# Altium PCB Backplane.PcbDoc (part 3 of 3)
Units mil, origin at the board's own origin, x right, y up, seen from the top; angles counter-clockwise.
Board outline 10300 x 6600 mil, 2 copper layers (Top Layer, Bottom Layer), stack 61.756 mil thick; 53 components, 149 nets, 1204 pads, 195 vias.
Unrouted connection lines stored in the file: 4.
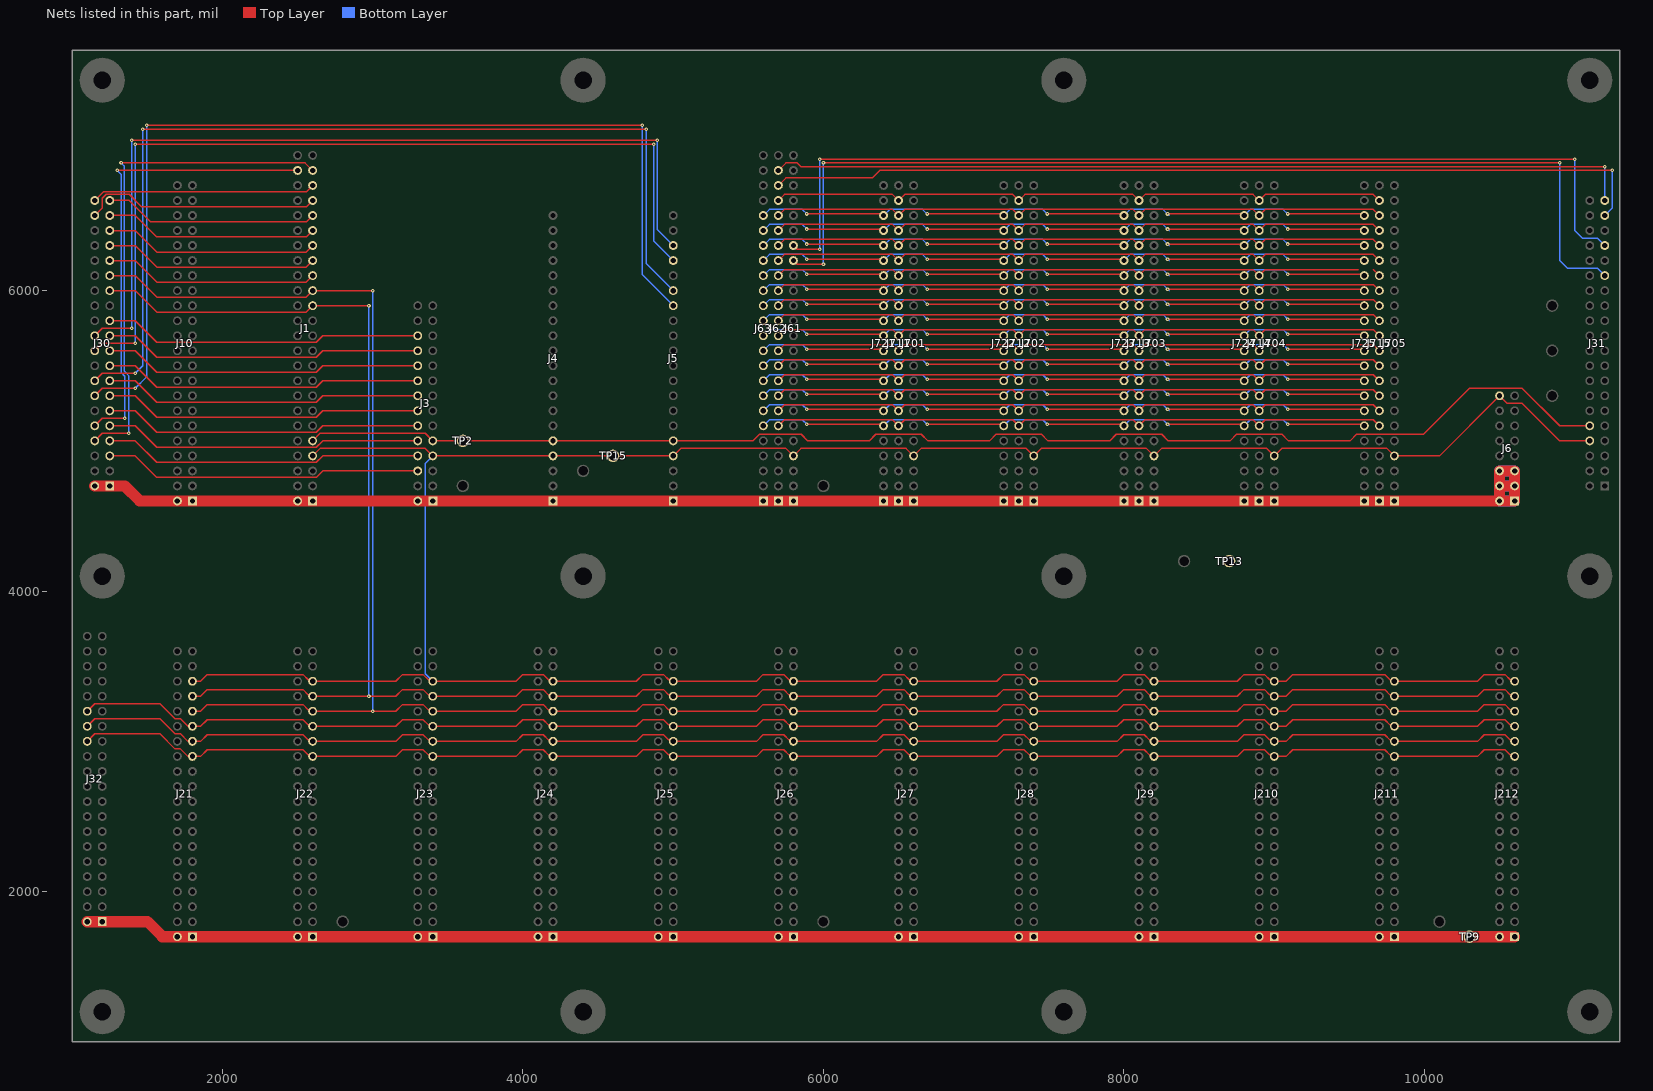
[diagram p3: the nets of this part, all layers, seen from the top]

## Via types
v1: diameter 24, hole 10, Top Layer to Bottom Layer, tented both sides, 195 vias

## Nets (pads, with @x,y where several pads share a name; then routed paths per layer and width w, separated by ;. In a path a pad name is that pad's centre, name@x,y a point inside that pad or via, vN(x,y) a via of type N, cw(c..) or ccw(c..) an arc to the next point about the centre after c; other vN are vias at no path point) (continued)
INST0: J3.20 J30.19 | length 2127
  Top Layer w10: J30.19@1250,5600 1420,5600 1563,5457 2624,5457 2667,5500 J3.20@3300,5500
INST1: J3.18 J30.17 | length 2127
  Top Layer w10: J30.17@1250,5500 1420,5500 1563,5357 2624,5357 2667,5400 J3.18@3300,5400
INST2: J3.16 J30.15 | length 2127
  Top Layer w10: J30.15@1250,5400 1420,5400 1563,5257 2624,5257 2667,5300 J3.16@3300,5300
INST3: J3.14 J30.13 | length 2127
  Top Layer w10: J30.13@1250,5300 1420,5300 1563,5157 2624,5157 2667,5200 J3.14@3300,5200
INST4: J3.12 J30.11 | length 2127
  Top Layer w10: J30.11@1250,5200 1420,5200 1563,5057 2624,5057 2667,5100 J3.12@3300,5100
INST5: J3.10 J30.9 | length 2127
  Top Layer w10: J30.9@1250,5100 1420,5100 1563,4957 2624,4957 2667,5000 J3.10@3300,5000
INST6: J3.8 J30.7 | length 2127
  Top Layer w10: J30.7@1250,5000 1420,5000 1563,4857 2624,4857 2667,4900 J3.8@3300,4900
INST7: J3.6 J30.5 | length 2127
  Top Layer w10: J30.5@1250,4900 1420,4900 1563,4757 2624,4757 2667,4800 J3.6@3300,4800
IS#: J1.46 J30.10 | length 3091.4
  Top Layer w10: J30.10@1150,5100 1200,5150 v1(1350,5150) ; v1(1300,6800) J1.46@2500,6800
  Bottom Layer w10: v1(1300,6800) 1325,6775 1325,5455 1350,5430 v1(1350,5150)
JI#: J5.14 J30.14 | length 6656.7
  Top Layer w10: J30.14@1150,5300 1200,5350 v1(1420,5350) ; v1(1495,7100) v1(4795,7100)
  Bottom Layer w10: v1(1420,5350) 1495,5425 v1(1495,7100) ; v1(4795,7100) 4795,6105 J5.14@5000,5900
JO#: J5.17 J30.20 | length 5894.6
  Top Layer w10: J30.20@1150,5600 1200,5650 v1(1420,5650) ; v1(1420,6975) v1(4870,6975)
  Bottom Layer w10: v1(1420,5650) v1(1420,6975) ; v1(4870,6975) 4870,6330 J5.17@5000,6200
KI#: J5.15 J30.16 | length 6436
  Top Layer w10: J30.16@1150,5400 1200,5450 v1(1420,5450) ; v1(1470,7075) v1(4820,7075)
  Bottom Layer w10: v1(1420,5450) 1470,5500 v1(1470,7075) ; v1(4820,7075) 4820,6180 J5.15@5000,6000
KO#: J5.18 J30.22 | length 5759.2
  Top Layer w10: J30.22@1150,5700 1200,5750 v1(1395,5750) ; v1(1395,7000) v1(4895,7000)
  Bottom Layer w10: v1(1395,5750) v1(1395,7000) ; v1(4895,7000) 4895,6405 J5.18@5000,6300
LM#: J1.9 J3.9 J4.5 J5.5 J31.10 TP2.1 | length 8970
  Top Layer w10: J1.9@2600,5000 2650,5050 3350,5050 J3.9@3400,5000 TP2.1@3600,5000 J4.5@4200,5000 J5.5@5000,5000 5530,5000 5573.47,5043.47 5851.53,5043.47 5895,5000 6305,5000 6348.47,5043.47 6651.53,5043.47 6695,5000 7105,5000 7148.47,5043.47 7451.53,5043.47 7495,5000 7905,5000 7948.47,5043.47 8251.53,5043.47 8295,5000 8705,5000 8748.47,5043.47 9051.53,5043.47 9095,5000 9505,5000 9548.47,5043.47 9993.47,5043.47 10300,5350 10650,5350 10900,5100 J31.10@11100,5100
M\1: J63.6 J721.6 J722.6 J723.6 J724.6 J725.6 | length 4167.9
  Top Layer w10: v1(5890,5110) 6390,5110 J721.6@6400,5100 ; v1(6690,5110) 7190,5110 J722.6@7200,5100 ; v1(7490,5110) 7990,5110 J723.6@8000,5100 ; v1(8290,5110) 8790,5110 J724.6@8800,5100 ; v1(9090,5110) 9590,5110 J725.6@9600,5100
  Bottom Layer w10: J63.6@5600,5100 5640.53,5140.53 5859.47,5140.53 v1(5890,5110) ; J721.6@6400,5100 6440.53,5140.53 6659.47,5140.53 v1(6690,5110) ; J722.6@7200,5100 7240.53,5140.53 7459.47,5140.53 v1(7490,5110) ; J723.6@8000,5100 8040.53,5140.53 8259.47,5140.53 v1(8290,5110) ; J724.6@8800,5100 8840.53,5140.53 9059.47,5140.53 v1(9090,5110)
M\2: J63.7 J721.7 J722.7 J723.7 J724.7 J725.7 | length 4167.9
  Top Layer w10: v1(5890,5210) 6390,5210 J721.7@6400,5200 ; v1(6690,5210) 7190,5210 J722.7@7200,5200 ; v1(7490,5210) 7990,5210 J723.7@8000,5200 ; v1(8290,5210) 8790,5210 J724.7@8800,5200 ; v1(9090,5210) 9590,5210 J725.7@9600,5200
  Bottom Layer w10: J63.7@5600,5200 5640.53,5240.53 5859.47,5240.53 v1(5890,5210) ; J721.7@6400,5200 6440.53,5240.53 6659.47,5240.53 v1(6690,5210) ; J722.7@7200,5200 7240.53,5240.53 7459.47,5240.53 v1(7490,5210) ; J723.7@8000,5200 8040.53,5240.53 8259.47,5240.53 v1(8290,5210) ; J724.7@8800,5200 8840.53,5240.53 9059.47,5240.53 v1(9090,5210)
M\3: J63.8 J721.8 J722.8 J723.8 J724.8 J725.8 | length 4167.9
  Top Layer w10: v1(5890,5310) 6390,5310 J721.8@6400,5300 ; v1(6690,5310) 7190,5310 J722.8@7200,5300 ; v1(7490,5310) 7990,5310 J723.8@8000,5300 ; v1(8290,5310) 8790,5310 J724.8@8800,5300 ; v1(9090,5310) 9590,5310 J725.8@9600,5300
  Bottom Layer w10: J63.8@5600,5300 5640.53,5340.53 5859.47,5340.53 v1(5890,5310) ; J721.8@6400,5300 6440.53,5340.53 6659.47,5340.53 v1(6690,5310) ; J722.8@7200,5300 7240.53,5340.53 7459.47,5340.53 v1(7490,5310) ; J723.8@8000,5300 8040.53,5340.53 8259.47,5340.53 v1(8290,5310) ; J724.8@8800,5300 8840.53,5340.53 9059.47,5340.53 v1(9090,5310)
M\4: J63.9 J721.9 J722.9 J723.9 J724.9 J725.9 | length 4167.9
  Top Layer w10: v1(5890,5410) 6390,5410 J721.9@6400,5400 ; v1(6690,5410) 7190,5410 J722.9@7200,5400 ; v1(7490,5410) 7990,5410 J723.9@8000,5400 ; v1(8290,5410) 8790,5410 J724.9@8800,5400 ; v1(9090,5410) 9590,5410 J725.9@9600,5400
  Bottom Layer w10: J63.9@5600,5400 5640.53,5440.53 5859.47,5440.53 v1(5890,5410) ; J721.9@6400,5400 6440.53,5440.53 6659.47,5440.53 v1(6690,5410) ; J722.9@7200,5400 7240.53,5440.53 7459.47,5440.53 v1(7490,5410) ; J723.9@8000,5400 8040.53,5440.53 8259.47,5440.53 v1(8290,5410) ; J724.9@8800,5400 8840.53,5440.53 9059.47,5440.53 v1(9090,5410)
M\5: J63.10 J721.10 J722.10 J723.10 J724.10 J725.10 | length 4167.9
  Top Layer w10: v1(5890,5510) 6390,5510 J721.10@6400,5500 ; v1(6690,5510) 7190,5510 J722.10@7200,5500 ; v1(7490,5510) 7990,5510 J723.10@8000,5500 ; v1(8290,5510) 8790,5510 J724.10@8800,5500 ; v1(9090,5510) 9590,5510 J725.10@9600,5500
  Bottom Layer w10: J63.10@5600,5500 5640.53,5540.53 5859.47,5540.53 v1(5890,5510) ; J721.10@6400,5500 6440.53,5540.53 6659.47,5540.53 v1(6690,5510) ; J722.10@7200,5500 7240.53,5540.53 7459.47,5540.53 v1(7490,5510) ; J723.10@8000,5500 8040.53,5540.53 8259.47,5540.53 v1(8290,5510) ; J724.10@8800,5500 8840.53,5540.53 9059.47,5540.53 v1(9090,5510)
M\6: J63.11 J721.11 J722.11 J723.11 J724.11 J725.11 | length 4167.9
  Top Layer w10: v1(5890,5610) 6390,5610 J721.11@6400,5600 ; v1(6690,5610) 7190,5610 J722.11@7200,5600 ; v1(7490,5610) 7990,5610 J723.11@8000,5600 ; v1(8290,5610) 8790,5610 J724.11@8800,5600 ; v1(9090,5610) 9590,5610 J725.11@9600,5600
  Bottom Layer w10: J63.11@5600,5600 5640.53,5640.53 5859.47,5640.53 v1(5890,5610) ; J721.11@6400,5600 6440.53,5640.53 6659.47,5640.53 v1(6690,5610) ; J722.11@7200,5600 7240.53,5640.53 7459.47,5640.53 v1(7490,5610) ; J723.11@8000,5600 8040.53,5640.53 8259.47,5640.53 v1(8290,5610) ; J724.11@8800,5600 8840.53,5640.53 9059.47,5640.53 v1(9090,5610)
M\7: J63.12 J721.12 J722.12 J723.12 J724.12 J725.12 | length 4167.9
  Top Layer w10: v1(5890,5710) 6390,5710 J721.12@6400,5700 ; v1(6690,5710) 7190,5710 J722.12@7200,5700 ; v1(7490,5710) 7990,5710 J723.12@8000,5700 ; v1(8290,5710) 8790,5710 J724.12@8800,5700 ; v1(9090,5710) 9590,5710 J725.12@9600,5700
  Bottom Layer w10: J63.12@5600,5700 5640.53,5740.53 5859.47,5740.53 v1(5890,5710) ; J721.12@6400,5700 6440.53,5740.53 6659.47,5740.53 v1(6690,5710) ; J722.12@7200,5700 7240.53,5740.53 7459.47,5740.53 v1(7490,5710) ; J723.12@8000,5700 8040.53,5740.53 8259.47,5740.53 v1(8290,5710) ; J724.12@8800,5700 8840.53,5740.53 9059.47,5740.53 v1(9090,5710)
M\8: J63.13 J721.13 J722.13 J723.13 J724.13 J725.13 | length 4167.9
  Top Layer w10: v1(5890,5810) 6390,5810 J721.13@6400,5800 ; v1(6690,5810) 7190,5810 J722.13@7200,5800 ; v1(7490,5810) 7990,5810 J723.13@8000,5800 ; v1(8290,5810) 8790,5810 J724.13@8800,5800 ; v1(9090,5810) 9590,5810 J725.13@9600,5800
  Bottom Layer w10: J63.13@5600,5800 5640.53,5840.53 5859.47,5840.53 v1(5890,5810) ; J721.13@6400,5800 6440.53,5840.53 6659.47,5840.53 v1(6690,5810) ; J722.13@7200,5800 7240.53,5840.53 7459.47,5840.53 v1(7490,5810) ; J723.13@8000,5800 8040.53,5840.53 8259.47,5840.53 v1(8290,5810) ; J724.13@8800,5800 8840.53,5840.53 9059.47,5840.53 v1(9090,5810)
M\9: J63.14 J721.14 J722.14 J723.14 J724.14 J725.14 | length 4167.9
  Top Layer w10: v1(5890,5910) 6390,5910 J721.14@6400,5900 ; v1(6690,5910) 7190,5910 J722.14@7200,5900 ; v1(7490,5910) 7990,5910 J723.14@8000,5900 ; v1(8290,5910) 8790,5910 J724.14@8800,5900 ; v1(9090,5910) 9590,5910 J725.14@9600,5900
  Bottom Layer w10: J63.14@5600,5900 5640.53,5940.53 5859.47,5940.53 v1(5890,5910) ; J721.14@6400,5900 6440.53,5940.53 6659.47,5940.53 v1(6690,5910) ; J722.14@7200,5900 7240.53,5940.53 7459.47,5940.53 v1(7490,5910) ; J723.14@8000,5900 8040.53,5940.53 8259.47,5940.53 v1(8290,5910) ; J724.14@8800,5900 8840.53,5940.53 9059.47,5940.53 v1(9090,5910)
M\10: J63.15 J721.15 J722.15 J723.15 J724.15 J725.15 | length 4167.9
  Top Layer w10: v1(5890,6010) 6390,6010 J721.15@6400,6000 ; v1(6690,6010) 7190,6010 J722.15@7200,6000 ; v1(7490,6010) 7990,6010 J723.15@8000,6000 ; v1(8290,6010) 8790,6010 J724.15@8800,6000 ; v1(9090,6010) 9590,6010 J725.15@9600,6000
  Bottom Layer w10: J63.15@5600,6000 5640.53,6040.53 5859.47,6040.53 v1(5890,6010) ; J721.15@6400,6000 6440.53,6040.53 6659.47,6040.53 v1(6690,6010) ; J722.15@7200,6000 7240.53,6040.53 7459.47,6040.53 v1(7490,6010) ; J723.15@8000,6000 8040.53,6040.53 8259.47,6040.53 v1(8290,6010) ; J724.15@8800,6000 8840.53,6040.53 9059.47,6040.53 v1(9090,6010)
M\11: J63.16 J721.16 J722.16 J723.16 J724.16 J725.16 | length 4167.9
  Top Layer w10: v1(5890,6110) 6390,6110 J721.16@6400,6100 ; v1(6690,6110) 7190,6110 J722.16@7200,6100 ; v1(7490,6110) 7990,6110 J723.16@8000,6100 ; v1(8290,6110) 8790,6110 J724.16@8800,6100 ; v1(9090,6110) 9590,6110 J725.16@9600,6100
  Bottom Layer w10: J63.16@5600,6100 5640.53,6140.53 5859.47,6140.53 v1(5890,6110) ; J721.16@6400,6100 6440.53,6140.53 6659.47,6140.53 v1(6690,6110) ; J722.16@7200,6100 7240.53,6140.53 7459.47,6140.53 v1(7490,6110) ; J723.16@8000,6100 8040.53,6140.53 8259.47,6140.53 v1(8290,6110) ; J724.16@8800,6100 8840.53,6140.53 9059.47,6140.53 v1(9090,6110)
M\12: J63.17 J721.17 J722.17 J723.17 J724.17 J725.17 | length 4167.9
  Top Layer w10: v1(5890,6210) 6390,6210 J721.17@6400,6200 ; v1(6690,6210) 7190,6210 J722.17@7200,6200 ; v1(7490,6210) 7990,6210 J723.17@8000,6200 ; v1(8290,6210) 8790,6210 J724.17@8800,6200 ; v1(9090,6210) 9590,6210 J725.17@9600,6200
  Bottom Layer w10: J63.17@5600,6200 5640.53,6240.53 5859.47,6240.53 v1(5890,6210) ; J721.17@6400,6200 6440.53,6240.53 6659.47,6240.53 v1(6690,6210) ; J722.17@7200,6200 7240.53,6240.53 7459.47,6240.53 v1(7490,6210) ; J723.17@8000,6200 8040.53,6240.53 8259.47,6240.53 v1(8290,6210) ; J724.17@8800,6200 8840.53,6240.53 9059.47,6240.53 v1(9090,6210)
M\13: J63.18 J721.18 J722.18 J723.18 J724.18 J725.18 | length 4167.9
  Top Layer w10: v1(5890,6310) 6390,6310 J721.18@6400,6300 ; v1(6690,6310) 7190,6310 J722.18@7200,6300 ; v1(7490,6310) 7990,6310 J723.18@8000,6300 ; v1(8290,6310) 8790,6310 J724.18@8800,6300 ; v1(9090,6310) 9590,6310 J725.18@9600,6300
  Bottom Layer w10: J63.18@5600,6300 5640.53,6340.53 5859.47,6340.53 v1(5890,6310) ; J721.18@6400,6300 6440.53,6340.53 6659.47,6340.53 v1(6690,6310) ; J722.18@7200,6300 7240.53,6340.53 7459.47,6340.53 v1(7490,6310) ; J723.18@8000,6300 8040.53,6340.53 8259.47,6340.53 v1(8290,6310) ; J724.18@8800,6300 8840.53,6340.53 9059.47,6340.53 v1(9090,6310)
M\14: J63.19 J721.19 J722.19 J723.19 J724.19 J725.19 | length 4167.9
  Top Layer w10: v1(5890,6410) 6390,6410 J721.19@6400,6400 ; v1(6690,6410) 7190,6410 J722.19@7200,6400 ; v1(7490,6410) 7990,6410 J723.19@8000,6400 ; v1(8290,6410) 8790,6410 J724.19@8800,6400 ; v1(9090,6410) 9590,6410 J725.19@9600,6400
  Bottom Layer w10: J63.19@5600,6400 5640.53,6440.53 5859.47,6440.53 v1(5890,6410) ; J721.19@6400,6400 6440.53,6440.53 6659.47,6440.53 v1(6690,6410) ; J722.19@7200,6400 7240.53,6440.53 7459.47,6440.53 v1(7490,6410) ; J723.19@8000,6400 8040.53,6440.53 8259.47,6440.53 v1(8290,6410) ; J724.19@8800,6400 8840.53,6440.53 9059.47,6440.53 v1(9090,6410)
M\15: J63.20 J721.20 J722.20 J723.20 J724.20 J725.20 | length 4167.9
  Top Layer w10: v1(5890,6510) 6390,6510 J721.20@6400,6500 ; v1(6690,6510) 7190,6510 J722.20@7200,6500 ; v1(7490,6510) 7990,6510 J723.20@8000,6500 ; v1(8290,6510) 8790,6510 J724.20@8800,6500 ; v1(9090,6510) 9590,6510 J725.20@9600,6500
  Bottom Layer w10: J63.20@5600,6500 5640.53,6540.53 5859.47,6540.53 v1(5890,6510) ; J721.20@6400,6500 6440.53,6540.53 6659.47,6540.53 v1(6690,6510) ; J722.20@7200,6500 7240.53,6540.53 7459.47,6540.53 v1(7490,6510) ; J723.20@8000,6500 8040.53,6540.53 8259.47,6540.53 v1(8290,6510) ; J724.20@8800,6500 8840.53,6540.53 9059.47,6540.53 v1(9090,6510)
MA#: J1.43 J30.40 | length 1491.4
  Top Layer w10: J30.40@1150,6600 1207,6657 2557,6657 J1.43@2600,6700
MC#: J1.45 J30.8 | length 3362.1
  Top Layer w10: J30.8@1150,5000 1200,5050 v1(1375,5050) ; v1(1325,6850) 2550,6850 J1.45@2600,6800
  Bottom Layer w10: v1(1325,6850) 1347,6828 1347,5463 1375,5435 v1(1375,5050)
MEM_LOAD: J1.27 J21.33 J22.33 J23.33 J24.33 J25.33 J26.33 J27.33 J28.33 J29.33 J30.27 J210.33 J211.33 J212.33 | length 13605.9
  Top Layer w10: J30.27@1250,6000 1420,6000 1563,5857 2557,5857 J1.27@2600,5900 v1(2975,5900) ; J21.33@1800,3300 1853.6,3300 1898.12,3344.53 ; 1900,3344.53 2535.47,3344.53 2570.61,3309.39 2590.61,3309.39 J22.33@2600,3300 v1(2975,3300) 3153.6,3300 3198.12,3344.53 3335.47,3344.53 3370.61,3309.39 3390.61,3309.39 J23.33@3400,3300 3953.6,3300 3998.12,3344.53 4135.47,3344.53 4170.61,3309.39 4190.61,3309.39 J24.33@4200,3300 4753.6,3300 4798.12,3344.53 4935.47,3344.53 4970.61,3309.39 4990.61,3309.39 J25.33@5000,3300 5553.6,3300 5598.12,3344.53 5735.47,3344.53 5770.61,3309.39 5790.61,3309.39 J26.33@5800,3300 6353.6,3300 6398.12,3344.53 6535.47,3344.53 6570.61,3309.39 6590.61,3309.39 J27.33@6600,3300 7153.6,3300 7198.12,3344.53 7335.47,3344.53 7370.61,3309.39 7390.61,3309.39 J28.33@7400,3300 7953.6,3300 7998.12,3344.53 8135.47,3344.53 8170.61,3309.39 8190.61,3309.39 J29.33@8200,3300 8753.6,3300 8798.12,3344.53 8935.47,3344.53 8970.61,3309.39 8990.61,3309.39 J210.33@9000,3300 9078.6,3300 9123.12,3344.53 9735.47,3344.53 9770.61,3309.39 9790.61,3309.39 J211.33@9800,3300 10353.6,3300 10398.12,3344.53 10535.47,3344.53 10570.61,3309.39 10590.61,3309.39 J212.33@10600,3300
  Bottom Layer w10: v1(2975,3300) v1(2975,5900)
MEM_OUT#: J1.29 J21.31 J22.31 J23.31 J24.31 J25.31 J26.31 J27.31 J28.31 J29.31 J30.29 J210.31 J211.31 J212.31 | length 13830.9
  Top Layer w10: J30.29@1250,6100 1420,6100 1563,5957 2557,5957 J1.29@2600,6000 v1(3000,6000) ; J21.31@1800,3200 1853.6,3200 1898.12,3244.53 ; 1900,3244.53 2535.47,3244.53 2570.61,3209.39 2590.61,3209.39 J22.31@2600,3200 v1(3000,3200) 3153.6,3200 3198.12,3244.53 3335.47,3244.53 3370.61,3209.39 3390.61,3209.39 J23.31@3400,3200 3953.6,3200 3998.12,3244.53 4135.47,3244.53 4170.61,3209.39 4190.61,3209.39 J24.31@4200,3200 4753.6,3200 4798.12,3244.53 4935.47,3244.53 4970.61,3209.39 4990.61,3209.39 J25.31@5000,3200 5553.6,3200 5598.12,3244.53 5735.47,3244.53 5770.61,3209.39 5790.61,3209.39 J26.31@5800,3200 6353.6,3200 6398.12,3244.53 6535.47,3244.53 6570.61,3209.39 6590.61,3209.39 J27.31@6600,3200 7153.6,3200 7198.12,3244.53 7335.47,3244.53 7370.61,3209.39 7390.61,3209.39 J28.31@7400,3200 7953.6,3200 7998.12,3244.53 8135.47,3244.53 8170.61,3209.39 8190.61,3209.39 J29.31@8200,3200 8753.6,3200 8798.12,3244.53 8935.47,3244.53 8970.61,3209.39 8990.61,3209.39 J210.31@9000,3200 9078.6,3200 9123.12,3244.53 9735.47,3244.53 9770.61,3209.39 9790.61,3209.39 J211.31@9800,3200 10353.6,3200 10398.12,3244.53 10535.47,3244.53 10570.61,3209.39 10590.61,3209.39 J212.31@10600,3200
  Bottom Layer w10: v1(3000,3200) v1(3000,6000)
MI#: J1.37 J30.37 | length 1427
  Top Layer w10: J30.37@1250,6500 1420,6500 1563,6357 2557,6357 J1.37@2600,6400
MO#: J1.31 J30.31 | length 1427
  Top Layer w10: J30.31@1250,6200 1420,6200 1563,6057 2557,6057 J1.31@2600,6100
NF: J31.33 J61.18 | length 6526.8
  Top Layer w10: J61.18@5800,6300 5825,6275 v1(5975,6275) ; v1(5975,6875) v1(11000,6875)
  Bottom Layer w10: v1(5975,6275) v1(5975,6875) ; v1(11000,6875) 11000,6400 11050,6350 11150,6350 J31.33@11200,6300
NI#: J1.39 J30.39 | length 1427
  Top Layer w10: J30.39@1250,6600 1380,6600 1523,6457 2557,6457 J1.39@2600,6500
NO#: J1.33 J30.33 | length 1427
  Top Layer w10: J30.33@1250,6300 1420,6300 1563,6157 2557,6157 J1.33@2600,6200
PI#: J3.22 J30.21 | length 2127
  Top Layer w10: J30.21@1250,5700 1420,5700 1563,5557 2624,5557 2667,5600 J3.22@3300,5600
PO#: J3.24 J30.23 | length 2127
  Top Layer w10: J30.23@1250,5800 1420,5800 1563,5657 2624,5657 2667,5700 J3.24@3300,5700
RFU_M25: J21.25 J22.25 J23.25 J24.25 J25.25 J26.25 J27.25 J28.25 J29.25 J32.26 J210.25 J211.25 J212.25 | length 9986.7
  Top Layer w10: J32.26@1100,3000 1150,3050 1585,3050 1685,2950 1720,2950 1770,2900 J21.25@1800,2900 1853.6,2900 1898.12,2944.53 ; 1900,2944.53 2535.47,2944.53 2570.61,2909.39 2590.61,2909.39 J22.25@2600,2900 3153.6,2900 3198.12,2944.53 3335.47,2944.53 3370.61,2909.39 3390.61,2909.39 J23.25@3400,2900 3953.6,2900 3998.12,2944.53 4135.47,2944.53 4170.61,2909.39 4190.61,2909.39 J24.25@4200,2900 4753.6,2900 4798.12,2944.53 4935.47,2944.53 4970.61,2909.39 4990.61,2909.39 J25.25@5000,2900 5553.6,2900 5598.12,2944.53 5735.47,2944.53 5770.61,2909.39 5790.61,2909.39 J26.25@5800,2900 6353.6,2900 6398.12,2944.53 6535.47,2944.53 6570.61,2909.39 6590.61,2909.39 J27.25@6600,2900 7153.6,2900 7198.12,2944.53 7335.47,2944.53 7370.61,2909.39 7390.61,2909.39 J28.25@7400,2900 7953.6,2900 7998.12,2944.53 8135.47,2944.53 8170.61,2909.39 8190.61,2909.39 J29.25@8200,2900 8753.6,2900 8798.12,2944.53 8935.47,2944.53 8970.61,2909.39 8990.61,2909.39 J210.25@9000,2900 9078.6,2900 9123.12,2944.53 9735.47,2944.53 9770.61,2909.39 9790.61,2909.39 J211.25@9800,2900 10353.6,2900 10398.12,2944.53 10535.47,2944.53 10570.61,2909.39 10590.61,2909.39 J212.25@10600,2900
RFU_M27: J21.27 J22.27 J23.27 J24.27 J25.27 J26.27 J27.27 J28.27 J29.27 J32.28 J210.27 J211.27 J212.27 | length 9986.7
  Top Layer w10: J32.28@1100,3100 1150,3150 1585,3150 1685,3050 1720,3050 1770,3000 J21.27@1800,3000 1853.6,3000 1898.12,3044.53 ; 1900,3044.53 2535.47,3044.53 2570.61,3009.39 2590.61,3009.39 J22.27@2600,3000 3153.6,3000 3198.12,3044.53 3335.47,3044.53 3370.61,3009.39 3390.61,3009.39 J23.27@3400,3000 3953.6,3000 3998.12,3044.53 4135.47,3044.53 4170.61,3009.39 4190.61,3009.39 J24.27@4200,3000 4753.6,3000 4798.12,3044.53 4935.47,3044.53 4970.61,3009.39 4990.61,3009.39 J25.27@5000,3000 5553.6,3000 5598.12,3044.53 5735.47,3044.53 5770.61,3009.39 5790.61,3009.39 J26.27@5800,3000 6353.6,3000 6398.12,3044.53 6535.47,3044.53 6570.61,3009.39 6590.61,3009.39 J27.27@6600,3000 7153.6,3000 7198.12,3044.53 7335.47,3044.53 7370.61,3009.39 7390.61,3009.39 J28.27@7400,3000 7953.6,3000 7998.12,3044.53 8135.47,3044.53 8170.61,3009.39 8190.61,3009.39 J29.27@8200,3000 8753.6,3000 8798.12,3044.53 8935.47,3044.53 8970.61,3009.39 8990.61,3009.39 J210.27@9000,3000 9078.6,3000 9123.12,3044.53 9735.47,3044.53 9770.61,3009.39 9790.61,3009.39 J211.27@9800,3000 10353.6,3000 10398.12,3044.53 10535.47,3044.53 10570.61,3009.39 10590.61,3009.39 J212.27@10600,3000
RFU_M29: J21.29 J22.29 J23.29 J24.29 J25.29 J26.29 J27.29 J28.29 J29.29 J32.30 J210.29 J211.29 J212.29 | length 9986.7
  Top Layer w10: J32.30@1100,3200 1150,3250 1585,3250 1685,3150 1720,3150 1770,3100 J21.29@1800,3100 1853.6,3100 1898.12,3144.53 ; 1900,3144.53 2535.47,3144.53 2570.61,3109.39 2590.61,3109.39 J22.29@2600,3100 3153.6,3100 3198.12,3144.53 3335.47,3144.53 3370.61,3109.39 3390.61,3109.39 J23.29@3400,3100 3953.6,3100 3998.12,3144.53 4135.47,3144.53 4170.61,3109.39 4190.61,3109.39 J24.29@4200,3100 4753.6,3100 4798.12,3144.53 4935.47,3144.53 4970.61,3109.39 4990.61,3109.39 J25.29@5000,3100 5553.6,3100 5598.12,3144.53 5735.47,3144.53 5770.61,3109.39 5790.61,3109.39 J26.29@5800,3100 6353.6,3100 6398.12,3144.53 6535.47,3144.53 6570.61,3109.39 6590.61,3109.39 J27.29@6600,3100 7153.6,3100 7198.12,3144.53 7335.47,3144.53 7370.61,3109.39 7390.61,3109.39 J28.29@7400,3100 7953.6,3100 7998.12,3144.53 8135.47,3144.53 8170.61,3109.39 8190.61,3109.39 J29.29@8200,3100 8753.6,3100 8798.12,3144.53 8935.47,3144.53 8970.61,3109.39 8990.61,3109.39 J210.29@9000,3100 9078.6,3100 9123.12,3144.53 9735.47,3144.53 9770.61,3109.39 9790.61,3109.39 J211.29@9800,3100 10353.6,3100 10398.12,3144.53 10535.47,3144.53 10570.61,3109.39 10590.61,3109.39 J212.29@10600,3100
RST#: J1.7 J3.7 J4.4 J5.4 J6.16 J21.35 J22.35 J23.35 J24.35 J25.35 J26.35 J27.35 J28.35 J29.35 J31.8 J61.4 J210.35 J211.35 J212.35 J701.4 J702.4 J703.4 J704.4 J705.4 TP15.1 | length 19825.2
  Top Layer w10: J21.35@1800,3400 1853.6,3400 1898.12,3444.53 ; 1900,3444.53 2535.47,3444.53 2570.61,3409.39 2590.61,3409.39 J22.35@2600,3400 3153.6,3400 3198.12,3444.53 3335.47,3444.53 3370.61,3409.39 3390.61,3409.39 J23.35@3400,3400 3953.6,3400 3998.12,3444.53 4135.47,3444.53 4170.61,3409.39 4190.61,3409.39 J24.35@4200,3400 4753.6,3400 4798.12,3444.53 4935.47,3444.53 4970.61,3409.39 4990.61,3409.39 J25.35@5000,3400 5553.6,3400 5598.12,3444.53 5735.47,3444.53 5770.61,3409.39 5790.61,3409.39 J26.35@5800,3400 6353.6,3400 6398.12,3444.53 6535.47,3444.53 6570.61,3409.39 6590.61,3409.39 J27.35@6600,3400 7153.6,3400 7198.12,3444.53 7335.47,3444.53 7370.61,3409.39 7390.61,3409.39 J28.35@7400,3400 7953.6,3400 7998.12,3444.53 8135.47,3444.53 8170.61,3409.39 8190.61,3409.39 J29.35@8200,3400 8753.6,3400 8798.12,3444.53 8935.47,3444.53 8970.61,3409.39 8990.61,3409.39 J210.35@9000,3400 9078.6,3400 9123.12,3444.53 9735.47,3444.53 9770.61,3409.39 9790.61,3409.39 J211.35@9800,3400 10353.6,3400 10398.12,3444.53 10535.47,3444.53 10570.61,3409.39 10590.61,3409.39 J212.35@10600,3400 ; J1.7@2600,4900 2650,4950 3350,4950 J3.7@3400,4900 J4.4@4200,4900 TP15.1@4600,4900 J5.4@5000,4900 5050,4950 5750,4950 J61.4@5800,4900 5850,4950 6550,4950 J701.4@6600,4900 6650,4950 7350,4950 J702.4@7400,4900 7450,4950 8150,4950 J703.4@8200,4900 8250,4950 8950,4950 J704.4@9000,4900 9050,4950 9750,4950 J705.4@9800,4900 10100,4900 J6.16@10500,5300 10550,5250 10650,5250 10900,5000 J31.8@11100,5000
  Bottom Layer w10: J23.35@3400,3400 3350,3450 3350,4850 J3.7@3400,4900
SI#: J1.41 J30.38 | length 1599.1
  Top Layer w10: J30.38@1150,6500 1200,6550 1200,6615 1226,6641 1379,6641 1463,6557 2557,6557 J1.41@2600,6600
SO#: J1.35 J30.35 | length 1427
  Top Layer w10: J30.35@1250,6400 1420,6400 1563,6257 2557,6257 J1.35@2600,6300
VCC: J1.1 J1.2 J3.1 J3.2 J4.1 J5.1 J6.1 J6.2 J6.3 J6.4 J6.5 J6.6 J10.1 J10.2 J21.1 J21.2 J22.1 J22.2 J23.1 J23.2 J24.1 J24.2 J25.1 J25.2 J26.1 J26.2 J27.1 J27.2 J28.1 J28.2 J29.1 J29.2 J30.1 J30.2 J32.1 J32.2 J61.1 J62.1 J63.1 J210.1 J210.2 J211.1 J211.2 J212.1 J212.2 J701.1 J702.1 J703.1 J704.1 J705.1 J711.1 J712.1 J713.1 J714.1 J715.1 J721.1 J722.1 J723.1 J724.1 J725.1 TP9.1 TP13.1 | length 20344.3
  Top Layer w75: J32.2@1100,1800 J32.1@1200,1800 1500,1800 1600,1700 J21.2@1700,1700 J21.1@1800,1700 J22.2@2500,1700 J22.1@2600,1700 J23.2@3300,1700 J23.1@3400,1700 J24.2@4100,1700 J24.1@4200,1700 J25.2@4900,1700 J25.1@5000,1700 J26.2@5700,1700 J26.1@5800,1700 J27.2@6500,1700 J27.1@6600,1700 J28.2@7300,1700 J28.1@7400,1700 J29.2@8100,1700 J29.1@8200,1700 J210.2@8900,1700 J210.1@9000,1700 J211.2@9700,1700 J211.1@9800,1700 TP9.1@10300,1700 J212.2@10500,1700 J212.1@10600,1700 ; J30.2@1150,4700 J30.1@1250,4700 1350,4700 1450,4600 J10.2@1700,4600 J10.1@1800,4600 2400,4600 J1.2@2500,4600 J3.1@3400,4600 J4.1@4200,4600 J5.1@5000,4600 ; J5.1@5011.47,4600 J5.1@5000,4600 ; J5.1@5000,4600 J63.1@5600,4600 J62.1@5700,4600 J61.1@5800,4600 J721.1@6400,4600 J711.1@6500,4600 J701.1@6600,4600 J722.1@7200,4600 J712.1@7300,4600 J702.1@7400,4600 J723.1@8000,4600 J713.1@8100,4600 J703.1@8200,4600 J724.1@8800,4600 J714.1@8900,4600 J704.1@9000,4600 J725.1@9600,4600 J715.1@9700,4600 J705.1@9800,4600 J6.2@10500,4600 ; J6.2@10500,4600 J6.1@10600,4600 J6.3@10600,4700 ; J6.2@10500,4600 J6.4@10500,4700 ; J6.4@10500,4700 J6.3@10600,4700 ; J6.4@10500,4700 J6.6@10500,4800 J6.5@10600,4800 J6.3@10600,4700
  Bottom Layer w75: J6.4@10500,4700 J6.2@10500,4600 J6.1@10600,4600 J6.3@10600,4700 ; J6.4@10500,4700 J6.6@10500,4800 J6.5@10600,4800 J6.3@10600,4700 ; J6.4@10500,4700 J6.3@10600,4700
X0: J62.13 J711.13 J712.13 J713.13 J714.13 J715.13 | length 4167.9
  Top Layer w10: J62.13@5700,5800 5740.53,5840.53 6459.47,5840.53 J711.13@6500,5800 6540.53,5840.53 7259.47,5840.53 J712.13@7300,5800 7340.53,5840.53 8059.47,5840.53 J713.13@8100,5800 8140.53,5840.53 8859.47,5840.53 J714.13@8900,5800 8940.53,5840.53 9659.47,5840.53 J715.13@9700,5800
X1: J62.12 J711.12 J712.12 J713.12 J714.12 J715.12 | length 4167.9
  Top Layer w10: J62.12@5700,5700 5740.53,5740.53 6459.47,5740.53 J711.12@6500,5700 6540.53,5740.53 7259.47,5740.53 J712.12@7300,5700 7340.53,5740.53 8059.47,5740.53 J713.12@8100,5700 8140.53,5740.53 8859.47,5740.53 J714.12@8900,5700 8940.53,5740.53 9659.47,5740.53 J715.12@9700,5700
X2: J62.11 J711.11 J712.11 J713.11 J714.11 J715.11 | length 4167.9
  Top Layer w10: J62.11@5700,5600 5740.53,5640.53 6459.47,5640.53 J711.11@6500,5600 6540.53,5640.53 7259.47,5640.53 J712.11@7300,5600 7340.53,5640.53 8059.47,5640.53 J713.11@8100,5600 8140.53,5640.53 8859.47,5640.53 J714.11@8900,5600 8940.53,5640.53 9659.47,5640.53 J715.11@9700,5600
X3: J62.10 J711.10 J712.10 J713.10 J714.10 J715.10 | length 4167.9
  Top Layer w10: J62.10@5700,5500 5740.53,5540.53 6459.47,5540.53 J711.10@6500,5500 6540.53,5540.53 7259.47,5540.53 J712.10@7300,5500 7340.53,5540.53 8059.47,5540.53 J713.10@8100,5500 8140.53,5540.53 8859.47,5540.53 J714.10@8900,5500 8940.53,5540.53 9659.47,5540.53 J715.10@9700,5500
X4: J62.9 J711.9 J712.9 J713.9 J714.9 J715.9 | length 4167.9
  Top Layer w10: J62.9@5700,5400 5740.53,5440.53 6459.47,5440.53 J711.9@6500,5400 6540.53,5440.53 7259.47,5440.53 J712.9@7300,5400 7340.53,5440.53 8059.47,5440.53 J713.9@8100,5400 8140.53,5440.53 8859.47,5440.53 J714.9@8900,5400 8940.53,5440.53 9659.47,5440.53 J715.9@9700,5400
X5: J62.8 J711.8 J712.8 J713.8 J714.8 J715.8 | length 4167.9
  Top Layer w10: J62.8@5700,5300 5740.53,5340.53 6459.47,5340.53 J711.8@6500,5300 6540.53,5340.53 7259.47,5340.53 J712.8@7300,5300 7340.53,5340.53 8059.47,5340.53 J713.8@8100,5300 8140.53,5340.53 8859.47,5340.53 J714.8@8900,5300 8940.53,5340.53 9659.47,5340.53 J715.8@9700,5300
X6: J62.7 J711.7 J712.7 J713.7 J714.7 J715.7 | length 4167.9
  Top Layer w10: J62.7@5700,5200 5740.53,5240.53 6459.47,5240.53 J711.7@6500,5200 6540.53,5240.53 7259.47,5240.53 J712.7@7300,5200 7340.53,5240.53 8059.47,5240.53 J713.7@8100,5200 8140.53,5240.53 8859.47,5240.53 J714.7@8900,5200 8940.53,5240.53 9659.47,5240.53 J715.7@9700,5200
X7: J62.6 J711.6 J712.6 J713.6 J714.6 J715.6 | length 4167.9
  Top Layer w10: J62.6@5700,5100 5740.53,5140.53 6459.47,5140.53 J711.6@6500,5100 6540.53,5140.53 7259.47,5140.53 J712.6@7300,5100 7340.53,5140.53 8059.47,5140.53 J713.6@8100,5100 8140.53,5140.53 8859.47,5140.53 J714.6@8900,5100 8940.53,5140.53 9659.47,5140.53 J715.6@9700,5100
XI#: J31.37 J62.22 | length 5912.1
  Top Layer w10: J62.22@5700,6700 5750,6750 6325,6750 6375,6800 v1(11250,6800)
  Bottom Layer w10: J31.37@11200,6500 11250,6550 v1(11250,6800)
Y0: J62.21 J711.21 J712.21 J713.21 J714.21 J715.21 | length 4167.9
  Top Layer w10: J62.21@5700,6600 5740.53,6640.53 6459.47,6640.53 J711.21@6500,6600 6540.53,6640.53 7259.47,6640.53 J712.21@7300,6600 7340.53,6640.53 8059.47,6640.53 J713.21@8100,6600 8140.53,6640.53 8859.47,6640.53 J714.21@8900,6600 8940.53,6640.53 9659.47,6640.53 J715.21@9700,6600
Y1: J62.20 J711.20 J712.20 J713.20 J714.20 J715.20 | length 4167.9
  Top Layer w10: J62.20@5700,6500 5740.53,6540.53 6459.47,6540.53 J711.20@6500,6500 6540.53,6540.53 7259.47,6540.53 J712.20@7300,6500 7340.53,6540.53 8059.47,6540.53 J713.20@8100,6500 8140.53,6540.53 8859.47,6540.53 J714.20@8900,6500 8940.53,6540.53 9659.47,6540.53 J715.20@9700,6500
Y2: J62.19 J711.19 J712.19 J713.19 J714.19 J715.19 | length 4167.9
  Top Layer w10: J62.19@5700,6400 5740.53,6440.53 6459.47,6440.53 J711.19@6500,6400 6540.53,6440.53 7259.47,6440.53 J712.19@7300,6400 7340.53,6440.53 8059.47,6440.53 J713.19@8100,6400 8140.53,6440.53 8859.47,6440.53 J714.19@8900,6400 8940.53,6440.53 9659.47,6440.53 J715.19@9700,6400
Y3: J62.18 J711.18 J712.18 J713.18 J714.18 J715.18 | length 4167.9
  Top Layer w10: J62.18@5700,6300 5740.53,6340.53 6459.47,6340.53 J711.18@6500,6300 6540.53,6340.53 7259.47,6340.53 J712.18@7300,6300 7340.53,6340.53 8059.47,6340.53 J713.18@8100,6300 8140.53,6340.53 8859.47,6340.53 J714.18@8900,6300 8940.53,6340.53 9659.47,6340.53 J715.18@9700,6300
Y4: J62.17 J711.17 J712.17 J713.17 J714.17 J715.17 | length 4167.9
  Top Layer w10: J62.17@5700,6200 5740.53,6240.53 6459.47,6240.53 J711.17@6500,6200 6540.53,6240.53 7259.47,6240.53 J712.17@7300,6200 7340.53,6240.53 8059.47,6240.53 J713.17@8100,6200 8140.53,6240.53 8859.47,6240.53 J714.17@8900,6200 8940.53,6240.53 9659.47,6240.53 J715.17@9700,6200
Y5: J62.16 J711.16 J712.16 J713.16 J714.16 J715.16 | length 4067.9
  Top Layer w10: J62.16@5700,6100 5740.53,6140.53 6459.47,6140.53 J711.16@6500,6100 6540.53,6140.53 7259.47,6140.53 J712.16@7300,6100 7340.53,6140.53 8059.47,6140.53 J713.16@8100,6100 8140.53,6140.53 8859.47,6140.53 J714.16@8900,6100 8940.53,6140.53 9559.47,6140.53 ; 9659.47,6140.53 J715.16@9700,6100
Y6: J62.15 J711.15 J712.15 J713.15 J714.15 J715.15 | length 4167.9
  Top Layer w10: J62.15@5700,6000 5740.53,6040.53 6459.47,6040.53 J711.15@6500,6000 6540.53,6040.53 7259.47,6040.53 J712.15@7300,6000 7340.53,6040.53 8059.47,6040.53 J713.15@8100,6000 8140.53,6040.53 8859.47,6040.53 J714.15@8900,6000 8940.53,6040.53 9659.47,6040.53 J715.15@9700,6000
Y7: J62.14 J711.14 J712.14 J713.14 J714.14 J715.14 | length 4167.9
  Top Layer w10: J62.14@5700,5900 5740.53,5940.53 6459.47,5940.53 J711.14@6500,5900 6540.53,5940.53 7259.47,5940.53 J712.14@7300,5900 7340.53,5940.53 8059.47,5940.53 J713.14@8100,5900 8140.53,5940.53 8859.47,5940.53 J714.14@8900,5900 8940.53,5940.53 9659.47,5940.53 J715.14@9700,5900
YI#: J31.39 J62.23 | length 5756.1
  Top Layer w10: J62.23@5700,6800 5750,6850 5825,6850 5850,6825 v1(11200,6825)
  Bottom Layer w10: J31.39@11200,6600 v1(11200,6825)
ZF: J31.29 J61.17 | length 6776.8
  Top Layer w10: J61.17@5800,6200 5825,6175 v1(6000,6175) ; v1(6000,6850) v1(10900,6850)
  Bottom Layer w10: v1(6000,6175) v1(6000,6850) ; v1(10900,6850) 10900,6200 10950,6150 11150,6150 J31.29@11200,6100
pads on no net: J1.47 J3.27 J4.20 J5.20 J31.1 J31.2 J31.3 J31.4 J31.11 J31.12 J31.13 J31.14 J31.15 J31.16 J31.17 J31.18 J31.19 J31.20 J31.21 J31.22 J31.23 J31.24 J31.25 J31.26 J31.27 J31.28 J31.30 J32.32 J32.34 J32.36 J32.38 J32.40 J61.5 J61.23 J61.24 J62.3 J62.4 J62.5 J62.24 J63.3 J63.4 J63.5 J701.5 J702.5 J703.5 J704.5 J705.5 J711.3 J711.4 J711.5 J712.3 J712.4 J712.5 J713.3 J713.4 J713.5 J714.3 J714.4 J714.5 J715.3 J715.4 J715.5 J721.3 J721.4 J721.5 J722.3 J722.4 J722.5 J723.3 J723.4 J723.5 J724.3 J724.4 J724.5 J725.3 J725.4 J725.5

## Polygon pours and split planes (outlines as drawn)
GND on Bottom Layer "NONET_L02_P000" (solid, remove dead copper, shelved, pour order 0): 1000,1000 1000,7600 10100,7600 10100,1000

## Other copper
Top Layer:
  region net VCC: 10460,4640 10460,4045 10700,3805 10700,1760 10680,1740 10460,1740 10460,1660 10850,1660 10930,1740 10930,3880 10640,4170 10640,4640

## Silkscreen, mask and mechanical layers (free items; w line width, h text height)
Top Overlay:
  lines w5: 1847.24,1500 1847.24,3800 1910.24,3800 1910.24,1500 1847.24,1500 ; 1847.24,4400 1847.24,7100 1910.24,7100 1910.24,4400 1847.24,4400 ; 2647.24,1500 2647.24,3800 2710.24,3800 2710.24,1500 2647.24,1500 ; 2647.24,4400 2710.24,4400 2710.24,7100 2647.24,7100 2647.24,4400 ; 3447.24,1500 3510.24,1500 3510.24,3800 3447.24,3800 3447.24,1500 ; 3447.24,4400 3447.24,7100 3510.24,7100 3510.24,4400 3447.24,4400 ; 4247.24,1500 4247.24,3800 4310.24,3800 4310.24,1500 4247.24,1500 ; 4247.24,4400 4310.24,4400 4310.24,7100 4247.24,7100 4247.24,4400 ; 5047.24,1500 5047.24,3800 5110.24,3800 5110.24,1500 5047.24,1500 ; 5047.24,4400 5110.24,4400 5110.24,7100 5047.24,7100 5047.24,4400 ; 5847.24,1500 5847.24,3800 5910.24,3800 5910.24,1500 5847.24,1500 ; 5847.24,4400 5847.24,7100 5910.24,7100 5910.24,4400 5847.24,4400 ; 6647.24,1500 6647.24,3800 6710.24,3800 6710.24,1500 6647.24,1500 ; 6647.24,4400 6710.24,4400 6710.24,7100 6647.24,7100 6647.24,4400 ; 7447.24,1500 7447.24,3800 7510.24,3800 7510.24,1500 7447.24,1500 ; 7447.24,4400 7510.24,4400 7510.24,7100 7447.24,7100 7447.24,4400 ; 8247.24,1500 8247.24,3800 8310.24,3800 8310.24,1500 8247.24,1500 ; 8247.24,4400 8310.24,4400 8310.24,7100 8247.24,7100 8247.24,4400 ; 9047.24,1500 9047.24,3800 9110.24,3800 9110.24,1500 9047.24,1500 ; 9047.24,4400 9047.24,7100 9110.24,7100 9110.24,4400 9047.24,4400 ; 9847.24,1500 9910.24,1500 9910.24,3800 9847.24,3800 9847.24,1500 ; 9847.24,4400 9910.24,4400 9910.24,7100 9847.24,7100 9847.24,4400 ; 10647.24,1500 10710.24,1500 10710.24,3800 10647.24,3800 10647.24,1500 ; 10647.24,4400 10710.24,4400 10710.24,7100 10647.24,7100 10647.24,4400

## Text inside footprints (layer, text, board x,y; h text height)
J21: Top Overlay "1" at 1820,1600 h50 r90; Top Overlay "2" at 1720,1600 h50 r90; Top Overlay "40" at 1720,3680 h50 r90; Top Overlay "39" at 1820,3680 h50 r90
J22: Top Overlay "1" at 2620,1600 h50 r90; Top Overlay "2" at 2520,1600 h50 r90; Top Overlay "40" at 2520,3680 h50 r90; Top Overlay "39" at 2620,3680 h50 r90
J23: Top Overlay "39" at 3420,3680 h50 r90; Top Overlay "40" at 3320,3680 h50 r90; Top Overlay "2" at 3320,1600 h50 r90; Top Overlay "1" at 3420,1600 h50 r90
J24: Top Overlay "1" at 4220,1600 h50 r90; Top Overlay "2" at 4120,1600 h50 r90; Top Overlay "40" at 4120,3680 h50 r90; Top Overlay "39" at 4220,3680 h50 r90
J25: Top Overlay "1" at 5020,1600 h50 r90; Top Overlay "2" at 4920,1600 h50 r90; Top Overlay "40" at 4920,3680 h50 r90; Top Overlay "39" at 5020,3680 h50 r90
J26: Top Overlay "1" at 5820,1600 h50 r90; Top Overlay "2" at 5720,1600 h50 r90; Top Overlay "40" at 5720,3680 h50 r90; Top Overlay "39" at 5820,3680 h50 r90
J27: Top Overlay "1" at 6620,1600 h50 r90; Top Overlay "2" at 6520,1600 h50 r90; Top Overlay "40" at 6520,3680 h50 r90; Top Overlay "39" at 6620,3680 h50 r90
J28: Top Overlay "1" at 7420,1600 h50 r90; Top Overlay "2" at 7320,1600 h50 r90; Top Overlay "40" at 7320,3680 h50 r90; Top Overlay "39" at 7420,3680 h50 r90
J29: Top Overlay "39" at 8220,3680 h50 r90; Top Overlay "40" at 8120,3680 h50 r90; Top Overlay "2" at 8120,1600 h50 r90; Top Overlay "1" at 8220,1600 h50 r90
J30: Top Overlay "39" at 1270,6680 h50 r90; Top Overlay "40" at 1170,6680 h50 r90; Top Overlay "2" at 1170,4600 h50 r90; Top Overlay "1" at 1270,4600 h50 r90
J31: Top Overlay "39" at 11220,6680 h50 r90; Top Overlay "40" at 11120,6680 h50 r90; Top Overlay "2" at 11120,4600 h50 r90; Top Overlay "1" at 11220,4600 h50 r90
J32: Top Overlay "1" at 1220,1700 h50 r90; Top Overlay "2" at 1120,1700 h50 r90; Top Overlay "40" at 1120,3780 h50 r90; Top Overlay "39" at 1220,3780 h50 r90
J210: Top Overlay "39" at 9020,3680 h50 r90; Top Overlay "40" at 8920,3680 h50 r90; Top Overlay "2" at 8920,1600 h50 r90; Top Overlay "1" at 9020,1600 h50 r90
J211: Top Overlay "1" at 9820,1600 h50 r90; Top Overlay "2" at 9720,1600 h50 r90; Top Overlay "40" at 9720,3680 h50 r90; Top Overlay "39" at 9820,3680 h50 r90
J212: Top Overlay "39" at 10620,3680 h50 r90; Top Overlay "40" at 10520,3680 h50 r90; Top Overlay "2" at 10520,1600 h50 r90; Top Overlay "1" at 10620,1600 h50 r90